# Altium PCB MDBT42Q.PcbDoc
Units mil, origin at the board's own origin, x right, y up, seen from the top; angles counter-clockwise.
Board outline 1035.03 x 1710.03 mil, 2 copper layers (Top Layer, Bottom Layer); 12 components, 9 nets, 28 pads, 2 vias.
Unrouted connection lines stored in the file: 22.
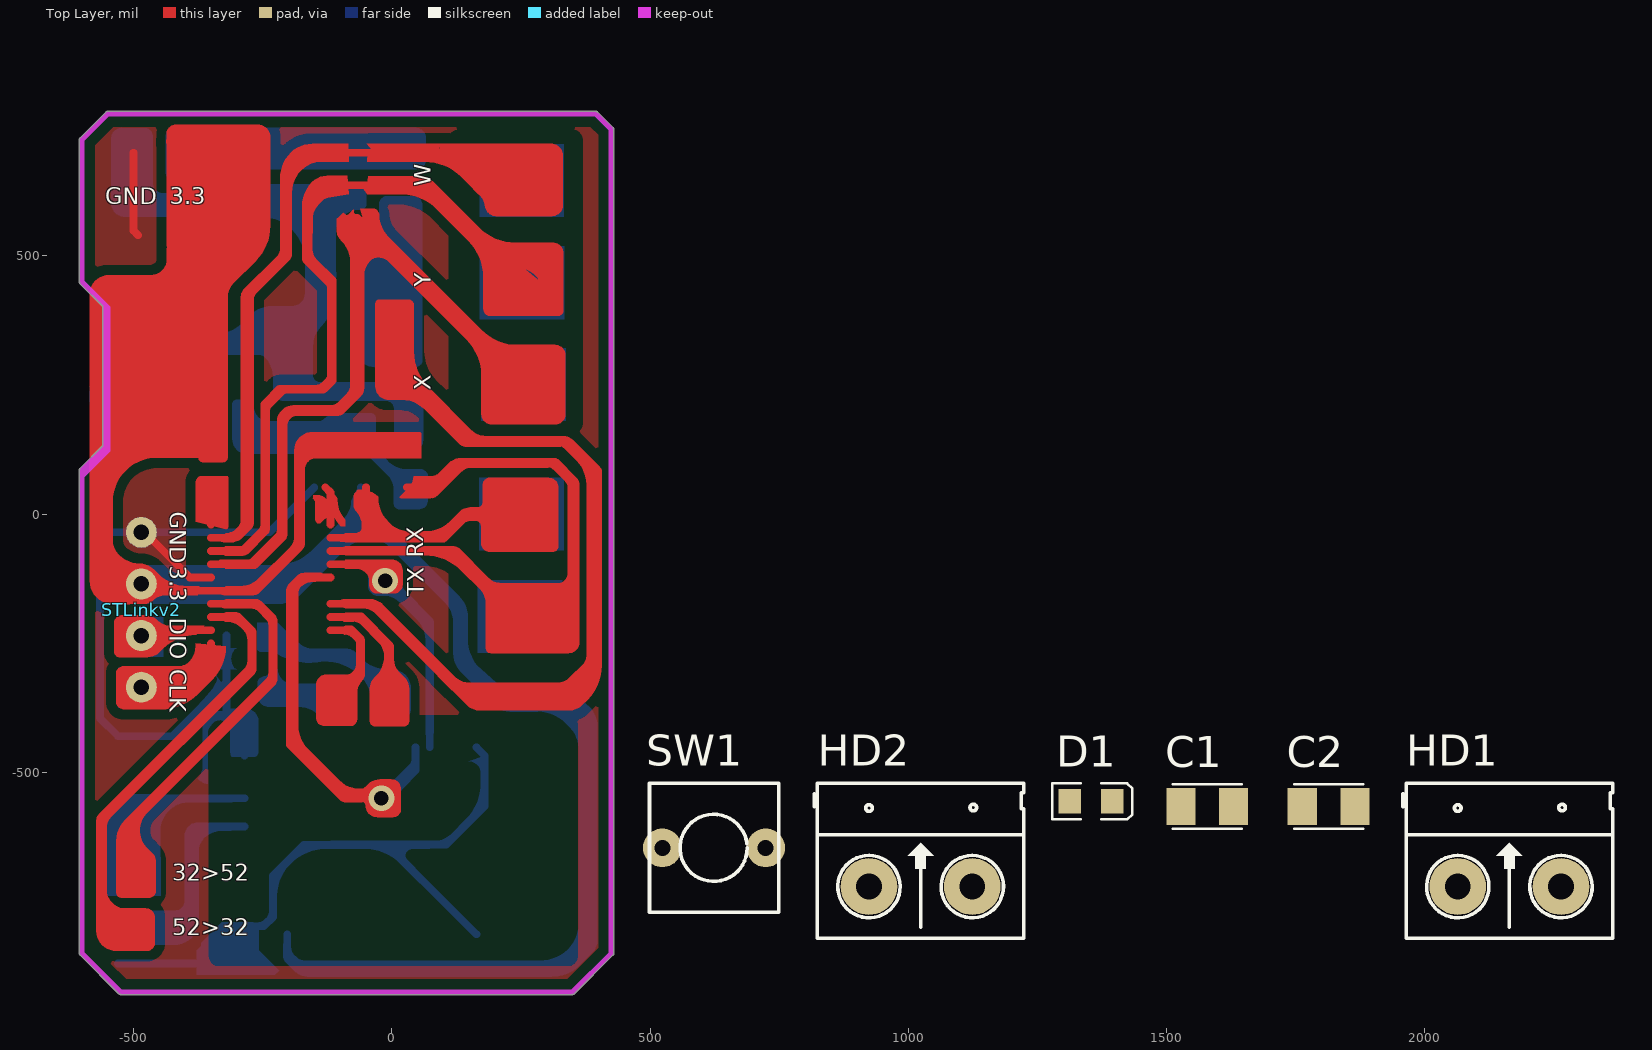
[diagram p0: Top Layer view]
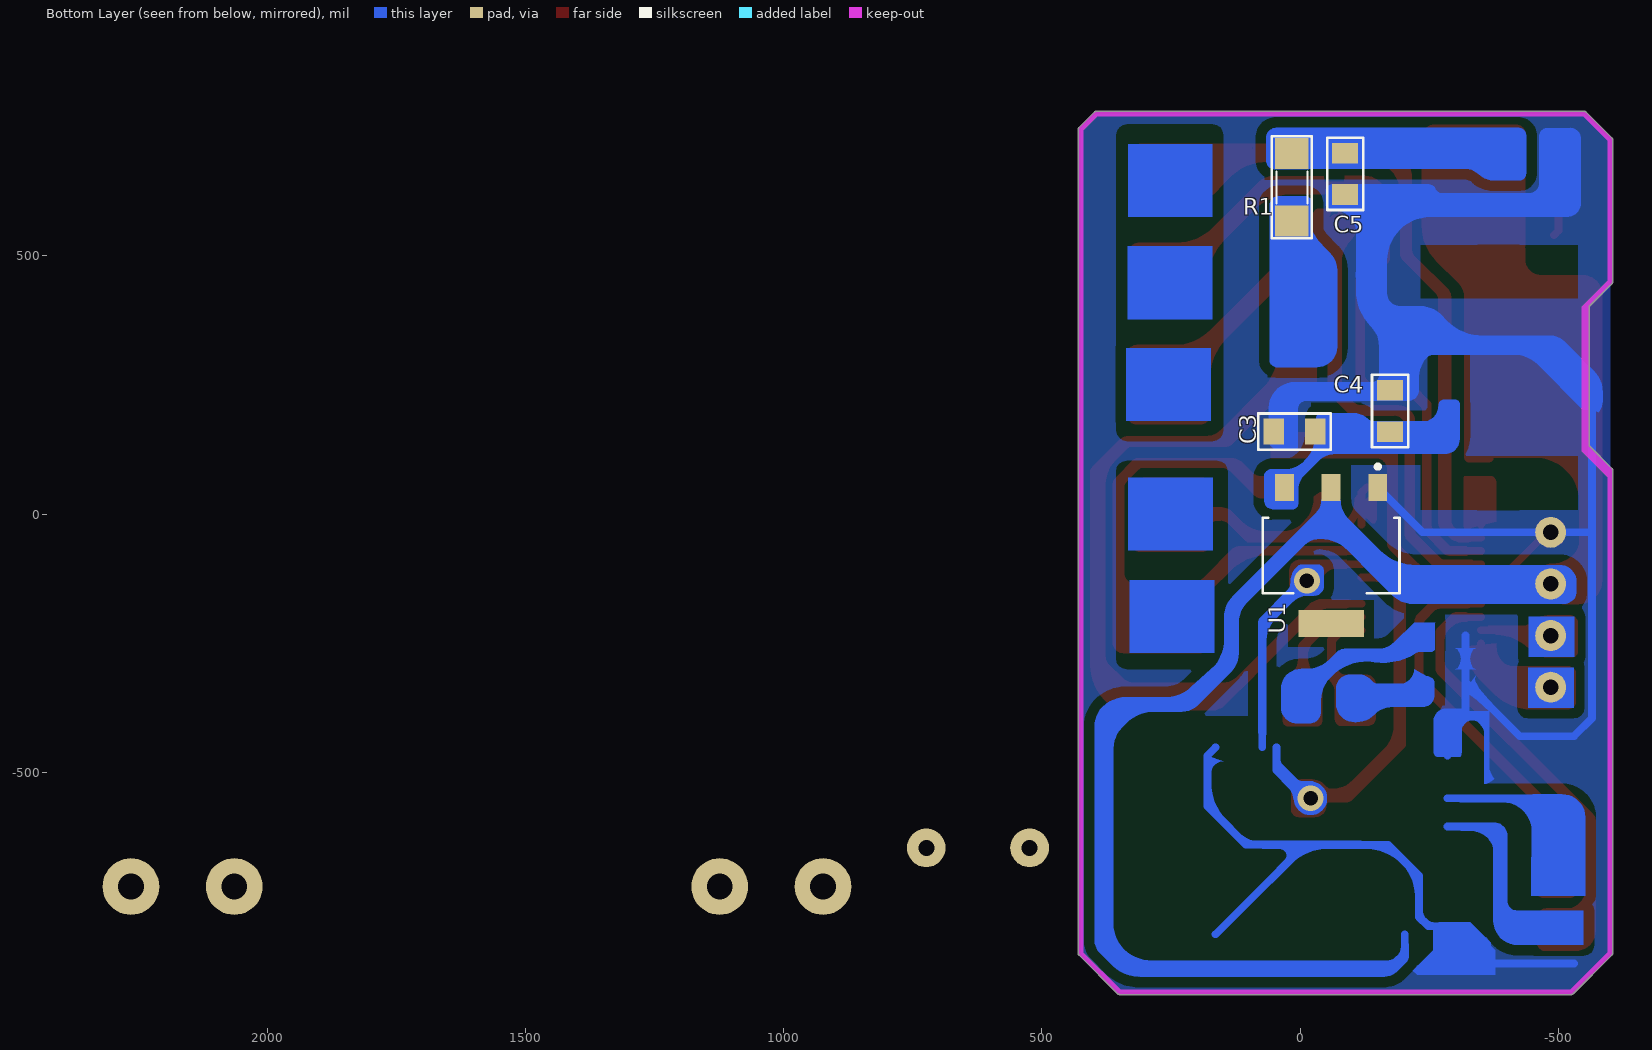
[diagram p1: Bottom Layer view, seen from below]

## Layer stack, top to bottom
Top Solder: solder mask 0.4, Solder Resist, Dk 3.5
Top Layer: signal copper 1.4
Dielectric1: dielectric 12.6, FR-4, Dk 4.8
Bottom Layer: signal copper 1.4
Bottom Solder: solder mask 0.4, Solder Resist, Dk 3.5

## Board outline
-605.02,-850 -605.02,85 cw(c-600,85) -603.53,88.56 -603.55,88.55 -559.66,132.43 -559.66,402.57 -603.55,446.45 ccw(c-600,450) -603.53,446.44 -603.55,446.45 cw(c-600,450) -605.02,450 cw(c-600,450) -605.02,450.03 -605.02,450 -605.02,725 cw(c-600,725) -603.55,728.55 -553.55,778.55 -553.56,778.53 cw(c-550,775) -550,780.02 395,780.02 cw(c395,775) 398.56,778.53 398.55,778.55 428.55,748.55 428.53,748.56 cw(c425,745) 430.01,745 430.01,-850 cw(c425,-850) 428.53,-853.56 428.55,-853.55 353.55,-928.55 353.56,-928.53 cw(c350,-925) 350,-930.01 -525,-930.01 cw(c-525,-925) -528.56,-928.53 -528.55,-928.55 -603.55,-853.55 -603.53,-853.56 cw(c-600,-850)

## Design rules (kind name [scope] priority, off if disabled: settings)
Clearance [All] p1: gap=20 ignorepadtopadclearanceinfootprint=FALSE except(0: Arc-Hole Track-Hole SMDPad-Hole THPad-Hole Via-Hole Fill-Hole Poly-Hole Region-Hole Text-Hole)
PlaneClearance [All] p1: clearance=39.37
PlaneConnect [All] p1: planeconnectstyle=Direct reliefexpansion=20 reliefentries=4 reliefconductorwidth=10 reliefairgap=10
PolygonConnect [All] p1: connectstyle=Direct reliefconductorwidth=10 reliefentries=4 polygonreliefangle="90 Angle" airgapwidth=10
RoomDefinition MDBT42Q [InComponentClass('MDBT42Q')] p1: confinementstyle=ConfineIn formatcopy=TRUE lockcomponents=FALSE outline 474,-866 2374,-866 2374,-411 474,-411
RoutingVias [All] p1: holewidth=28 width=50 viastyle="Through Hole" minholewidth=28 minwidth=50 maxholewidth=28 maxwidth=50
SolderMaskExpansion [All] p1: expansion=4
Width [All] p1: maxlimit=35 minlimit=15 preferedwidth=20 minimp=50.000000 maximp=50.000000 favimp=50.000000
28 further rules are at their usual default settings.

## Components (designator, comment, footprint, x,y, rotation, side; value= is the part's Value field where it differs from the comment)
C1 "C3216X5R1A106K160AB" CAPC3216X180 1579,-566 r0 top
C2 "C3216X5R1A106K160AB" CAPC3216X180 1814,-566 r0 top
C3 "2u2" 0805C-GENERIC -19.02,160 r0 bottom
C4 "2u2" 0805C-GENERIC -174,170 r90 bottom
C5 "10u" 0805C-GENERIC -87,689 r270 bottom
D1 "LED SMD" LED_0805_Blue 1354,-556 r0 top
HD1 "Header 2" HED2 2064,-721 r0 top
HD2 "Header 2" HED2 924,-721 r0 top
R1 "RESISTOR SMD" RES-SM-1206 16,568 r90 bottom value=1K
STLinkv2 "JP" "Jumper 4x1" -425,-295 r0 top
SW1 "SW" SW2 524,-646 r0 top
U1 "AMS1117-3.3" SOT229P700X180-4N -60,-80 r0 bottom

## Footprints (in the part's own frame and the unit in brackets; to place one, negate y for a bottom-side part, rotate by r counter-clockwise, add the part's x,y. Pads: shape width x height; smd on the part's side, far side on the other; paste and mask are expansions set on the pad)
0805C-GENERIC [mil] "CAPACITOR 0805"
  rect 40x50 smd: 1(-10,0) 2(70,0)
  silkscreen extent -40,-35 100,35, body extent -11,-25 70,25, height 26
CAPC3216X180 [mm]
  rect 1.44x1.82 smd: 1(-1.295,0) 2(1.295,0)
  silkscreen extent -1.7,-1.09 1.7,1.09
HED2 [mil] "Header 2, 2 pin, hight 300mil, Pin to Pin 200, Colour Green"
  round 110 hole 50: 1(0,0) 2(200,0)
  silkscreen extent -106,-100 300,200, body extent -92,-140 302,155, height 394
"Jumper 4x1" [mil]
  round 60 hole 30: 1(-60,260) 2(-60,160) 3(-60,60) 4(-60,-40)
LED_0805_Blue [mm] "Chip LED, 2-Leads, Body 2.0x1.3mm, IPC Medium Density"
  rect 1.1x1.2 smd: 1(-1.05,0) 2(1.05,0)
  silkscreen extent -1.91,-0.89 2.03,0.89, body extent -1,-0.63 1,0.62, height 0.68
RES-SM-1206 [mil]
  rect 60x65 smd: 1(0,0) 2(130,0)
  silkscreen extent -34,-38 164,39, body extent 2,-31 128,31, height 40
SOT229P700X180-4N [mm]
  rect 0.93x1.31 smd: 1(-2.29,-3.345) 2(0,-3.345) 3(2.29,-3.345)
  rect 3.24x1.31 smd: 4(0,3.345)
  silkscreen extent -3.36,-4.47 3.36,1.86
SW2 [mil] "SW button 2pin, 250x 250 mil"
  round 75 hole 31: 1(0,0) 2(200,0)
  silkscreen extent -25,-125 225,125

## Part data
C1 C2: "C Series 1206 10 uF 10 V ±10 % Tolerance X5R SMT Multilayer Ceramic Capacitor", Package="1206 TDK", Availability=Unavailable, MF=TDK, MP=C3216X5R1A106K160AB, Price="0.19 USD", SnapEDA_Link=https://www.snapeda.com/parts/C3216X5R1A106K160AB/TDK/view-part/?ref=snap
C3 C4 C5: library part 0805C-2U2-6V3-X5R-PAN, "CAPACITOR 0805 CERAMIC", Manufacturer="Panasonic - ECG", Manufacturer Part Number=ECJ-1VB0J225K, Supplier Part Number 1=PCC2273TR-ND, Reel=C7, Supplier 1=Digi-Key
D1: "LED"
HD1 HD2: library part Hed2, "Header 2 (Green)"
R1: "Resistor"
STLinkv2: library part "Jumper 4x1"
SW1: library part "Tact SW - 2Pin", "Switch button 2 pin"
U1: "Sot223/Pkg 1-Amp 3.3-Volt Low Drop Out Voltage Regulatator", Package=None, Availability=Unavailable, MF="Advanced Monolithic Systems", MP=AMS1117-3.3, Price=None, SnapEDA_Link=https://www.snapeda.com/parts/AMS1117-3.3/Advanced%20Monolithic%20Systems/view-part/?ref=snap

## Via types
v1: diameter 50, hole 28, Top Layer to Bottom Layer, 2 vias

## Nets (pads, with @x,y where several pads share a name; then routed paths per layer and width w, separated by ;. In a path a pad name is that pad's centre, name@x,y a point inside that pad or via, vN(x,y) a via of type N, cw(c..) or ccw(c..) an arc to the next point about the centre after c; other vN are vias at no path point)
32>52: 
52>32: 
+3.3V: C2.1 C4.1 D1.1 U1.2 | length 4778.2
  Top Layer w15: -345,135 -345,210.78 -399.21,265 -408.66,265 ; -280,574.02 -280,637.01 -280,700 -400,700 -400,548.66 -408.66,540 -408.66,265 ; -129.01,133.04 -166.96,133.04 -180,120 -180,-60 -267.95,-147.95 -350,-147.95 -472.05,-147.95 -485,-135 -555,-65 -555,118.66 -408.66,265 ; -129,135 -50,135 29,135
  Bottom Layer w15: -485,-135 -420,-135 -405,-150 -206.83,-150 -60,-3.17 -60,12.46 ; -400,700 -205,700 -196,709 -186,699 -87,699 -86,698 16,698 ; -202.32,-813.54 -202.32,-852.68 -180,-875 335,-875 380,-830 380,-430 320,-370 225,-370 135,-280 135,-182.54 -60,12.46 ; U1.2 -60,12.46
+12V: C1.1 C3.1 HD1.2 U1.3
GND: C1.2 C2.2 C3.2 C4.2 C5.2 D1.2 HD1.1 SW1.2 U1.1 | length 3404.5
  Top Layer w15: -478.37,-35 -391.01,-122.36 -350,-122.36
  Bottom Layer w15: -500,700 -500,638.64 -468.39,607.03 -196,607.03 ; -320,-235 -320,-325 ; -285,-467.09 -285,-425 -320,-390 -320,-325 ; U1.1 -236.85,-35 -485,-35 -564.26,-35 -565,-35.74 ; C5.2 -98.97,607.03 -196,607.03 ; C3.2@31.97,160 31.97,203.03 -5,240 C4.2 -195,261 -195,360 ; -565,-35.74 -565,235 -483.82,316.18 -287.91,316.18 -244.09,360 -195,360 ; -565,-35.74 -565,-395 -530,-430 -425,-430 -320,-325 ; -196,607.03 -129,540.03 -129,447 -129,426 -195,360
MD_RESET: 
NetC5_1: C5.1 R1.1 SW1.1 | length 321.9
  Bottom Layer w15: -49,447 -49,414 5,360 16,371 R1.1
PWM_YELLOW: HD2.1 HD2.2 R1.2 STLinkv2.1 STLinkv2.2 STLinkv2.3 STLinkv2.4 | length 369.8
  Top Layer w15: STLinkv2.4@-500,-350 STLinkv2.4 -403.81,-335 -350,-281.19 -350,-250.32 ; STLinkv2.3@-500,-250 STLinkv2.3 -435,-235 -424.72,-224.72 -350,-224.72
SWDCLK: 
pads on no net: U1.4
copper on no net: | length 13507.8
  Top Layer w15: -500,-800 -528.48,-800 -562,-766.48 -562,-592 -270,-300 -270,-230 -300.87,-199.13 -350,-199.13 ; -500,-700 -500,-590 -230,-320 -230,-205 -261.46,-173.54 -350,-173.54 ; -500,700 -500,548.66 -491.34,540 ; -350,-96.77 -266.77,-96.77 -212,-42 -212,183 -195,200 -105,200 -67.4,237.6 -67.4,574.02 250,256.61 250,250 ; -350,-71.18 -286.18,-71.18 -245,-30 -245,210 -214,241 -134.68,241 -116,259.68 -116,446 -163.75,493.75 -163.75,591.25 -117.99,637.01 -67.4,637.01 62.99,637.01 250,450 ; -350,-45.59 -305.59,-45.59 -280,-20 -280,425 -204.16,500.84 -204.16,649.84 -154,700 -67.4,700 105.5,700 156,649.5 250,649.5 ; -350,-20 -350,55 ; -129,52.32 -118.66,41.98 -118.66,-20 ; -118.66,-224.72 -80.28,-224.72 -60,-245 -60,-310 -105,-355 ; -118.66,-199.13 -62.53,-199.13 -5,-256.66 -5,-355 ; -118.66,-173.54 -38.64,-173.54 142.82,-355 340,-355 395,-300 395,80 335.32,139.68 145.32,139.68 5,280 5,360 ; -118.66,-122.36 -170.13,-122.36 -190,-142.23 -190,-445.92 -85.92,-550 v1(-20,-550) ; -118.66,-96.77 -45.07,-96.77 v1(-12.88,-128.96) v1@-12.88,-122.88 ; -118.66,-71.18 121.18,-71.18 250,-200 255,-205 320,-205 355,-170 355,60 315,100 132.95,100 85.27,52.32 29,52.32 ; -118.66,-45.59 -5,-45.59 ; -50,52.32 -50,-0.59 -5,-45.59 ; 250,0 145,0 99.41,-45.59 -5,-45.59
  Bottom Layer w15: -530.01,-870 -357.21,-870 -285,-797.79 -247.79,-797.79 -230,-780 -230,-700 -170,-640 -9.72,-640 ; -500,-800 -411.05,-800 -386.73,-775.69 -386.73,-631.73 -359.88,-604.88 -285,-604.88 ; -500,-700 -500,-600 -449.76,-549.76 -285,-549.76 ; -287.91,213.82 -287.91,187.55 -260.36,160 -174,160 -70,160 -70,151.85 30.16,51.69 ; -240,-325 -210,-355 -110,-355 ; -240,-235 -207.67,-235 -169.72,-272.95 -87.05,-272.95 -5,-355 ; -105,-355 -110,-355 ; -105,-350 -110,-355 ; v1(-20,-550) 45.71,-484.29 45.71,-451.34 ; v1(-12.88,-128.96) 73.27,-215.11 73.27,-451.34 ; 163.82,-813.54 -9.72,-640 ; 163.82,-451.34 180,-467.52 180,-565 105,-640 -9.72,-640

## Polygon pours and split planes (outlines as drawn)
GND on Top Layer "GND_L01_P013" (solid, pour order 13): -600,725 -550,775 395,775 425,745 425,-850 350,-925 -525,-925 -600,-850
GND on Top Layer "GND_L01_P001" (solid, pour order 1): -276.99,660.49
no net on Top Layer "NONET_L01_P011" (solid, pour order 11): 240.32,727.54
GND on Bottom Layer "GND_L02_P027" (solid, pour order 27): -600,725 -550,775 395,775 425,745 425,-850 350,-925 -525,-925 -600,-850
no net on Bottom Layer "NONET_L02_P017" (solid, pour order 17): -599.05,725.14

## Keep-outs
Top Layer:
  lines w10: -600,-850 -600,85 -554.65,130.35 -554.65,404.65 -600,450 -600,725 -550,775 395,775 425,745 425,-850 350,-925 -525,-925 -600,-850
Bottom Layer:
  lines w10: -600,-850 -600,85 -554.65,130.35 -554.65,404.65 -600,450 -600,725 -550,775 395,775 425,745 425,-850 350,-925 -525,-925 -600,-850
Keep-Out Layer:
  lines w10: -600,-850 -525,-925 350,-925 425,-850 425,745 395,775 -550,775 -600,725 -600,450 -550,400 -550,123.66 -600,73.66 -600,-850

## Other copper
Top Layer:
  region: -85.83,-87.91 0.51,-87.91 cw(c0.51,-108.16) 20.76,-108.16 cw(c17.05,-108.16) 17.05,-111.87 -29.32,-111.87 cw(c-29.32,-98.79) -42.4,-98.79 ccw(c-46.19,-98.79) -46.19,-95 -94.72,-95
  region: -89.93,-105.35 -71.59,-105.35 cw(c-71.59,-137.34) -48.97,-114.72 cw(c-62.71,-128.46) -43.28,-128.46 -43.28,-139.02 ccw(c-28.79,-139.02) -28.79,-153.51 3.72,-153.51 ccw(c3.72,-136.47) 20.76,-136.47 20.76,-110.21 ccw(c0.2,-110.21) 0.2,-89.65 -87.75,-89.65 ccw(c-87.75,-98.06) -96.17,-98.06 -96.17,-99.64
  region: 336.29,63.29 cw(c325.37,52.36) 340.82,52.36 340.82,-114.65 cw(c321.73,-114.65) 321.73,-133.74 271.8,-133.74 ccw(c294.88,-133.74) 294.88,-156.82 325.17,-156.82 ccw(c325.17,-128.83) 353.16,-128.83 353.16,58.16 cw(c355,58.16) 355,60 348.17,60 cw(c348.17,70.24) 337.93,70.24
  region: -515.58,-763.31 cw(c-515.58,-726.54) -552.35,-726.54 -552.35,-725.66 cw(c-553.4,-725.66) -553.4,-726.7 -559.37,-726.7 cw(c-559.37,-729.64) -556.44,-729.64 -556.44,-758.97 ccw(c-545.59,-758.97) -545.59,-769.82 -512.82,-769.82 cw(c-512.82,-777.63) -505,-777.63
  region: -321.13,-190.2 -300.1,-190.2 cw(c-300.1,-200.31) -292.94,-193.16 -265.64,-220.47 cw(c-274.41,-229.24) -262,-229.25 -262,-299.6 cw(c-274.74,-299.6) -265.73,-308.61 -542.75,-585.62 ccw(c-519.56,-608.81) -552.35,-608.81 -552.35,-725.66 ccw(c-517.84,-731.28) -542.23,-756.34 -537.3,-759.97 ccw(c-523.23,-740.83) -515.58,-763.31 -476.34,-763.31 cw(c-476.34,-780.99) -458.66,-780.99 -458.66,-829.42 cw(c-474.92,-829.42) -474.92,-845.68 -532.9,-845.68 cw(c-532.9,-806.79) -571.8,-806.79 -571.8,-591.67 cw(c-556.04,-591.67) -567.18,-580.53 -285.06,-298.4 ccw(c-299.12,-284.33) -279.23,-284.33 -279.23,-243.76 ccw(c-306.18,-243.76) -287.12,-224.7 -291.81,-220.01 ccw(c-321.11,-249.3) -321.12,-207.87 cw(c-321.12,-201.52) -325.61,-206.01 -328.1,-203.52 cw(c-326.44,-201.86) -328.79,-201.86 -328.79,-194.71
  region: -321.51,-164.99 -260.92,-164.99 cw(c-260.92,-176) -253.13,-168.21 -226.4,-194.94 cw(c-238.22,-206.76) -221.51,-206.76 -221.51,-318.7 cw(c-238.85,-318.7) -226.59,-330.96 -475.54,-579.91 ccw(c-446.54,-608.91) -487.55,-608.91 -487.55,-614.92 ccw(c-445.33,-614.92) -475.19,-644.78 -463.92,-656.04 cw(c-481.51,-673.64) -456.64,-673.64 -456.64,-729.29 cw(c-469.83,-729.29) -469.83,-742.48 -523.42,-742.48 cw(c-523.42,-732.59) -533.31,-732.59 -533.31,-632.23 cw(c-477.02,-632.23) -516.82,-592.43 -243.99,-319.59 ccw(c-256.93,-306.64) -238.62,-306.64 -238.62,-215.47 ccw(c-256.27,-215.47) -243.79,-203 -258.69,-188.1 ccw(c-272.14,-201.55) -272.14,-182.53 -322.71,-182.53 cw(c-322.71,-172.66) -329.69,-179.64 cw(c-320.74,-170.69) -333.4,-170.69 -333.4,-169.16
  region: -147.71,-131.15 -153.08,-131.15 ccw(c-153.08,-163.99) -176.3,-140.77 ccw(c-164.36,-152.71) -181.24,-152.71 -181.24,-407.42 ccw(c-113.15,-407.42) -161.3,-455.57 -101.52,-515.35 ccw(c-61.36,-475.2) -61.36,-531.99 ccw(c-61.36,-515.91) -49.99,-527.28 -45.31,-522.6 cw(c-23.53,-544.37) -23.53,-513.58 -0.66,-513.58 cw(c-0.66,-532) 17.76,-532 17.76,-571.57 cw(c2.88,-571.57) 2.88,-586.45 -28.07,-586.45 cw(c-28.07,-563.73) -50.79,-563.73 ccw(c-57.06,-563.73) -57.06,-557.46 -89.97,-557.46 cw(c-89.97,-542.42) -100.6,-553.06 -202.32,-451.34 cw(c-197.41,-446.43) -204.36,-446.43 -204.36,-149.51 cw(c-181.62,-149.51) -197.7,-133.43 -184.04,-119.78 cw(c-169.41,-134.41) -169.41,-113.72 -137.39,-113.72 cw(c-137.39,-119.36) -133.4,-115.37
  region: 42.92,378.68 42.92,315.21 ccw(c142.92,315.21) 72.21,244.49 152.31,164.4 ccw(c184.77,196.86) 184.77,150.95 207.83,150.95 207.83,147.82 cw(c202.38,147.82) 206.23,143.97 156.74,143.97 cw(c156.74,195.04) 120.62,158.93 58.99,220.56 cw(c129.7,291.27) 29.7,291.27 29.7,380.06 ccw(c25.32,380.06) 28.42,383.16
  region: -72.92,-218.9 ccw(c-80.21,-226.19) -80.21,-215.88 -89.71,-215.88 -89.91,-216.09 -89.86,-216.15 -89.86,-218.26 -82.21,-218.26 cw(c-82.21,-223.99) -78.16,-219.94 -77.34,-220.76 ccw(c-72.78,-216.2) -72.78,-222.65
  region: -89.91,-216.09 -79.7,-216.09 cw(c-79.7,-225.68) -72.92,-218.9 -55.5,-236.33 cw(c-62.93,-243.76) -52.42,-243.76 -52.42,-311.17 cw(c-66.32,-311.17) -56.49,-321 ccw(c-30.26,-347.23) -67.36,-347.23 -67.36,-397.68 cw(c-79.4,-397.68) -79.4,-409.72 -131.4,-409.72 cw(c-131.4,-394.67) -146.45,-394.67 -146.45,-329.81 cw(c-127.57,-329.81) -127.57,-310.93 -89.83,-310.93 ccw(c-89.83,-290.37) -75.29,-304.91 ccw(c-91.79,-288.41) -68.46,-288.41 -68.46,-253.36 ccw(c-82.92,-253.36) -72.69,-243.14 -77,-238.84 ccw(c-89.88,-251.72) -89.88,-233.51 cw(c-89.88,-227.51) -94.12,-231.75 -95.14,-230.73 cw(c-92.32,-227.91) -96.31,-227.91 -96.31,-218.82
  region: -89.7,-190.41 -59.83,-190.41 cw(c-59.83,-196.24) -55.7,-192.12 0.67,-248.49 cw(c-7.83,-256.99) 4.19,-256.99 4.19,-281.92 ccw(c37.37,-281.92) 13.91,-305.38 24.85,-316.32 cw(c3.85,-337.32) 33.54,-337.32 33.54,-400.39 cw(c23.03,-400.39) 23.03,-410.9 -31.71,-410.9 cw(c-31.71,-400.19) -42.42,-400.19 -42.42,-336.72 cw(c-14.66,-336.72) -34.29,-317.09 -30.16,-312.95 ccw(c-68.08,-275.03) -14.45,-275.03 -14.45,-274.73 ccw(c-51.05,-274.73) -25.17,-248.85 -60.53,-213.49 ccw(c-73.93,-226.88) -73.93,-207.94 -92.1,-207.94 cw(c-92.1,-205.01) -94.18,-207.08 cw(c-90.26,-203.17) -95.8,-203.17 -95.8,-196.96
  region: 377.15,-275.18 cw(c357.53,-275.18) 371.41,-289.06 343.07,-317.39 cw(c322.34,-296.67) 322.34,-325.98 149.46,-325.98 cw(c149.46,-286.84) 121.78,-314.52 94.9,-287.64 ccw(c108.57,-301.31) 89.24,-301.31 89.24,-313.38 146.15,-370.29 ccw(c168.74,-347.7) 168.74,-379.64 345.18,-379.64 ccw(c345.18,-347.23) 368.1,-370.15 378.96,-359.3 ccw(c313.71,-294.05) 405.99,-294.05 ccw(c388.96,-294.05) 401,-282 391.83,-272.83
  region: 312.3,-268.77 342.9,-268.77 ccw(c342.9,-248.63) 363.04,-248.63
  region: 309.66,-133.62 329.24,-133.62 ccw(c329.24,-117.4) 345.45,-117.4 345.45,39.64 ccw(c310.21,39.64) 335.13,64.57 313.9,85.79 ccw(c302.86,74.75) 302.86,90.37 155.17,90.37 ccw(c155.17,59.53) 133.36,81.34 88.21,36.18 cw(c75.73,48.67) 75.73,31.01 19.83,31.01 cw(c19.83,38.36) 14.64,33.16 32.8,51.33 ccw(c10.13,74) 42.2,74 78.08,74 ccw(c78.08,91.82) 90.68,79.22 110.09,98.62 cw(c134.4,74.31) 134.4,108.69 315.35,108.69 cw(c315.35,99.38) 321.93,105.97 357.95,69.94 cw(c345.66,57.65) 363.04,57.65 363.04,-246.47 cw(c341.41,-246.47) 341.41,-268.11 301.61,-268.11 cw(c301.61,-265.38) 298.89,-265.38 298.89,-206.17 ccw(c283.53,-206.17) 283.53,-190.82
  region: -89.68,-164.67 -40.85,-164.67 cw(c-40.85,-195.74) -18.88,-173.77 -21.51,-176.4 cw(c-24.27,-173.64) -24.27,-177.54 -92.04,-177.54 cw(c-92.04,-171.47) -96.34,-175.76 cw(c-94.69,-174.12) -97.02,-174.12 -97.02,-165.74
  region: 377.07,-289.11 377.07,57.48 ccw(c312.22,57.48) 358.08,103.33 333.59,127.83 ccw(c326.82,121.06) 326.82,130.63 145.17,130.63 cw(c145.17,152.73) 129.54,137.1 63.62,203.03 ccw(c19.33,158.74) 19.33,221.37 -6.01,221.37 cw(c-6.01,246.92) -31.55,246.92 -31.55,408.4 cw(c-24.62,408.4) -24.62,415.33 32.35,415.33 cw(c32.35,404.84) 42.84,404.84 42.84,286.49 ccw(c117.45,286.49) 64.69,233.73 137.29,161.14 ccw(c161.66,185.51) 161.66,151.05 333.1,151.05 cw(c333.1,126.67) 350.33,143.91 402.21,92.03 cw(c390.88,80.7) 406.9,80.7 406.9,-290.04 cw(c371.61,-290.04) 396.56,-315 cw(c361.66,-280.09) 361.66,-329.45 361.27,-329.45 cw(c381.93,-329.45) 367.32,-314.85 374.58,-307.59
  region: -89.68,-182.4 -53.61,-182.4 cw(c-53.61,-211.65) -32.93,-190.97 137.74,-361.64 ccw(c145.19,-354.19) 145.19,-364.72 339.23,-364.72 ccw(c339.23,-346.36) 352.21,-359.35 395.29,-316.27 ccw(c369.48,-290.45) 405.99,-290.45 380.3,-290.45 cw(c380.3,-285.89) 377.07,-289.11 333.21,-332.98 cw(c312.56,-312.32) 312.56,-341.53 162.19,-341.53 cw(c162.19,-309.41) 139.48,-332.12 -16.14,-176.5 ccw(c-43.93,-204.29) -43.93,-164.99 -93.27,-164.99 ccw(c-93.27,-174.79) -100.2,-167.86 ccw(c-98.28,-169.78) -100.99,-169.78 -100.99,-177.95 cw(c-100.99,-182.06) -98.09,-179.15 -96.67,-180.57
  region: -89.67,-87.92 -89.69,-89.96 -89.36,-89.63 -84.98,-89.63 -84.98,-89.6 ccw(c-87.01,-89.6) -85.57,-88.17 -85.83,-87.91
  region: -89.74,-62.44 120.83,-62.44 cw(c120.83,-75.77) 130.26,-66.35 186,-122.09 ccw(c213.84,-94.24) 213.84,-133.62 309.66,-133.62 cw(c309.66,-141.2) 317.25,-141.2 317.25,-263.82 cw(c312.3,-263.82) 312.3,-268.77 191.42,-268.77 cw(c191.42,-259.45) 182.1,-259.45 182.1,-172.15 ccw(c144.76,-172.15) 171.17,-145.75 134.63,-109.21 ccw(c63.92,-179.92) 63.92,-79.92 -89.74,-79.92 ccw(c-103.58,-79.92) -93.8,-70.14 -98.82,-65.12
  region: -89.76,-54.47 98.59,-54.47 ccw(c98.59,-42.98) 106.72,-51.11 140.07,-17.75 cw(c153.45,-31.12) 153.45,-12.21 160.45,-12.21 cw(c160.45,-25.08) 173.32,-25.08 173.32,-56.98 ccw(c188.99,-56.98) 188.99,-72.66 312.11,-72.66 ccw(c312.11,-62.01) 322.75,-62.01 322.75,51.32 ccw(c303.73,51.32) 303.73,70.34 189.27,70.34 ccw(c189.27,57.18) 176.11,57.18 176.11,23.32 cw(c166.04,23.32) 166.04,13.26 150.7,13.26 ccw(c150.7,-12.54) 132.46,5.7 113.61,-13.15 cw(c64.78,35.68) 64.78,-33.38 ccw(c64.78,-46.74) 55.33,-37.29 52.15,-40.47 cw(c37.28,-25.61) 37.28,-46.63 -100.65,-46.63
  region: -89.97,-36.9 -72.29,-36.9 ccw(c-72.29,-20.08) -60.4,-31.97 ccw(c-66.5,-25.86) -57.87,-25.86 -57.87,-20.93 ccw(c-95.57,-20.93) -68.91,5.73 -69.52,6.34 cw(c-59.71,16.15) -73.58,16.15 -73.58,35.39 cw(c-65.08,35.39) -71.09,41.4 -65.5,46.98 -58.11,46.98 cw(c-58.11,2.08) -26.36,33.83 -26.36,32.91 ccw(c42.85,32.91) -6.09,-16.03 ccw(c35.79,25.85) 35.79,-33.38 93.78,-33.38 93.78,-53.59 93.73,-53.63 -95.64,-53.63 cw(c-95.64,-38.89) -106.06,-49.31 -103.77,-47.03 ccw(c-106.3,-44.5) -102.72,-44.5
  region: -105.5,30.79 -105.5,27.13 ccw(c-51.47,27.13) -89.67,-11.08 -89.67,-21.33 cw(c-93.09,-21.33) -90.67,-23.74 -98.45,-23.74 cw(c-54.71,20) -116.57,20 -116.57,23.25 cw(c-96.45,23.25) -110.68,37.47 -110.44,37.71
  region: -147.73,-11.31 -147.73,18.56 ccw(c-164.68,18.56) -152.69,30.55 -152.53,30.71 -152.53,36.86 -142.25,36.86 cw(c-142.25,18.02) -128.92,31.34 cw(c-142.25,18.02) -123.4,18.02 -123.4,-6.51 ccw(c-123.4,-16.37) -130.37,-9.39 -136.79,-15.81 cw(c-140.62,-11.98) -140.62,-17.39 -144.36,-17.39
  region net +3.3V: -321.08,-139.22 -294.59,-139.22 ccw(c-294.59,-85.39) -256.53,-123.45 -198.02,-64.94 ccw(c-220.37,-42.58) -188.76,-42.58 -188.76,124.09 cw(c-153.76,124.09) -153.76,159.08 cw(c-153.76,145.59) -140.27,145.59 -140.27,114.54 cw(c-146.26,114.54) -146.26,108.55 ccw(c-146.26,86.3) -168.52,86.3 -168.52,-55.97 cw(c-187.61,-55.97) -174.11,-69.47 -256.79,-152.16 cw(c-267.4,-141.55) -267.4,-156.55 -325.45,-156.55 cw(c-325.45,-143.97) -334.35,-152.86 -333.73,-152.24 ccw(c-340.04,-145.94) -331.12,-145.94
  region net +3.3V: -150.07,159.08 ccw(c-150.07,121.6) -187.55,121.6 -187.55,103.53 ccw(c-172.74,103.53) -172.74,88.73 cw(c-152.92,88.73) -152.92,108.55 -148.62,108.55 ccw(c-148.62,120.41) -136.76,120.41 -136.76,130.15
  region net +3.3V: 56.35,108.55 -148.62,108.55 cw(c-148.62,116.97) -157.04,116.97 -157.04,152.12 cw(c-150.07,152.12) -150.07,159.08 53.05,159.08 cw(c53.05,155.28) 56.85,155.28 56.85,108.76
  region net +3.3V: -435.49,510.98 -435.49,494.09 cw(c-466.67,494.09) -466.67,462.91 -547.72,462.91 ccw(c-547.72,425.72) -584.91,425.72 -584.91,143.74 ccw(c-576.03,143.74) -576.03,134.85 -447.25,134.85 ccw(c-447.25,178.16) -403.94,178.16 -403.94,503.42 ccw(c-409.5,503.42) -409.5,508.98
  region net +3.3V: -435.49,519.84 -435.49,738.99 cw(c-422.24,738.99) -431.61,748.36 cw(c-417.88,734.63) -417.88,754.05 -416.79,754.05 -416.79,502.29 cw(c-441.8,502.29) -424.12,484.61
  region: -53.63,369.68 -53.63,244.22 cw(c-75.54,244.22) -62.13,226.89
  region: -80.13,326.55 -80.13,250.88 cw(c-104.57,250.88) -87.29,233.61 -103.71,217.19 cw(c-119.7,233.18) -119.7,210.56 -192.16,210.56 ccw(c-192.16,185.14) -210.14,203.12 -215.98,197.27 ccw(c-201,182.29) -222.19,182.29 -222.19,-32.14 cw(c-229.81,-32.14) -224.42,-37.53 -272.69,-85.8 cw(c-277.52,-80.98) -277.52,-87.8 -329.56,-87.8 ccw(c-329.56,-97.92) -336.72,-90.76 -322.6,-104.88 ccw(c-321.08,-103.37) -321.08,-105.51 -265.97,-105.51 ccw(c-265.97,-97.85) -260.56,-103.27 -205.79,-48.5 ccw(c-212.9,-41.39) -202.84,-41.39 -202.84,170.63 cw(c-182.56,170.63) -196.9,184.97 cw(c-182.18,170.25) -182.18,191.07 -103.16,191.07 ccw(c-103.16,204.24) -93.84,194.93 -60.05,228.72 ccw(c-74.01,242.69) -54.26,242.69 -54.26,343.14 ccw(c-60.9,343.14) -56.21,347.83 -59.08,344.96 ccw(c-46.64,332.52) -64.23,332.52
  region: -173.61,512.37 -173.61,495.22 ccw(c-161.11,495.22) -169.95,486.39 -126.79,443.22 cw(c-131.39,438.61) -124.88,438.61 -124.88,269.48 cw(c-134.37,269.48) -127.66,262.77 -135.38,255.04 cw(c-147.4,267.06) -147.4,250.06 -216.22,250.06 ccw(c-216.22,241.27) -222.44,247.49 -249.22,220.7 ccw(c-237.21,208.68) -254.2,208.68 -254.2,-22.72 cw(c-260.84,-22.72) -256.15,-27.42 -290.62,-61.89 cw(c-291.91,-60.6) -291.91,-62.42 -322.58,-62.42 ccw(c-322,-63.62) -323.33,-63.78 -323.33,-80.02 -287.25,-80.02 ccw(c-287.25,-67.51) -278.4,-76.35 -239.9,-37.85 ccw(c-248.39,-29.37) -236.39,-29.37 -236.39,199.2 cw(c-224.19,199.2) -232.82,207.83 -208.45,232.2 cw(c-204.2,227.96) -204.2,233.96 -135.29,233.96 ccw(c-135.29,249.08) -124.6,238.39 -110.6,252.38 ccw(c-118.53,260.31) -107.32,260.31 -107.32,452.24 ccw(c-114.76,452.24) -109.5,457.5 -145.95,493.95 cw(c-127.58,512.32) -153.56,512.37
  region: -321.13,-36.71 ccw(c-321.13,-9.66) -302,-28.79 -297.42,-24.21 ccw(c-310.54,-11.09) -291.99,-11.09 -291.99,421.36 cw(c-272.34,421.36) -286.23,435.26 -223.69,497.8 ccw(c-242,516.12) -216.1,516.12 -193.65,516.12 -193.61,516.15 -193.61,503.09 cw(c-210.3,503.09) -198.5,491.29 -263.14,426.65 ccw(c-253.03,416.53) -267.33,416.53 -267.33,-16.85 cw(c-283.18,-16.85) -271.97,-28.06 -289.18,-45.26 cw(c-311.04,-23.4) -311.04,-54.32 -324.08,-54.32 cw(c-324.08,-41.75) -332.97,-50.64
  region net +3.3V: -540.51,-34.83 -540.51,-51.38 ccw(c-503.9,-51.38) -529.79,-77.27 -527.75,-79.3 ccw(c-488.14,-39.69) -488.14,-95.71 -483.03,-100.81 cw(c-508.57,-126.35) -472.46,-126.35 cw(c-504.69,-126.35) -481.9,-149.14 -505.07,-172.31 cw(c-509.76,-167.62) -509.76,-174.25 -539.21,-174.25 cw(c-539.21,-128.7) -584.76,-128.7 -584.76,-30.54 cw(c-580.05,-30.54) -580.05,-25.83
  region: -86.3,654.99 -126.14,654.99 ccw(c-126.14,616.02) -153.69,643.57 ccw(c-105.61,595.49) -173.61,595.49 -173.61,512.32 -153.56,512.32 -153.33,575.13 cw(c-106.79,568.68) -135.13,606.16 cw(c-121,594.75) -123.98,612.67 -83.63,619.39
  region: -84.06,717.33 -154.2,717.33 ccw(c-154.2,659.01) -195.44,700.25 ccw(c-145.72,650.53) -216.04,650.53 -216.04,514.58 ccw(c-213.95,514.58) -215.42,513.11 cw(c-208.07,505.76) -208.07,516.15 -193.61,516.15 -193.61,622.03 cw(c-131.03,622.03) -175.28,666.28 cw(c-136.13,627.12) -136.13,682.5 -83.5,682.5
  region: -80.13,326.55 -80.13,488.37 ccw(c-137.54,488.37) -96.95,528.96 cw(c-72.77,553.14) -106.96,553.14 -106.96,572.3 ccw(c-106.96,576.2) -104.2,573.44 -93.71,583.93 ccw(c-71.86,605.78) -71.86,574.87 -49.09,574.87 ccw(c3.21,574.87) -33.78,537.89 69.57,434.55 ccw(c84.4,419.72) 63.42,419.72 63.42,419.68 -5.01,488.11 ccw(c-27.12,466) -27.12,497.26 ccw(c-27.12,477.75) -40.92,491.55 -42.63,489.84 ccw(c-16.07,463.28) -53.63,463.28 -53.63,337.85 cw(c-66.88,337.85) -57.51,328.49
  region: 299.27,327.61 243.95,327.61 cw(c243.95,427.61) 173.23,356.9 -6.82,536.96 cw(c35.8,579.58) -24.47,579.58 ccw(c-36.75,579.58) -36.75,591.86 -60.67,591.86 -50.6,553.77 212.46,286.62
  region: 173.85,219.89 173.85,267.93 ccw(c73.85,267.93) 144.56,338.64 -90.78,573.98 -76.74,588.02 cw(c-73.96,585.24) -73.96,589.17 ccw(c-60.87,589.17) -70.13,579.91 218.46,291.33 cw(c204.54,277.42) 224.22,277.42
  region: 185.1,327.76 316.77,327.76 cw(c316.77,308.68) 335.85,308.68 335.85,192.75 cw(c317.38,192.75) 317.38,174.29 192.98,174.29 cw(c192.98,193.66) 173.61,193.66 173.61,313.22 cw(c187.83,313.22) 187.83,327.45
  region: -47.25,619.63 16.52,619.63 cw(c16.52,519.63) 87.23,590.34 148.27,529.3 cw(c77.56,458.59) 177.56,458.59 177.56,396.92 ccw(c190.61,396.92) 190.61,383.88 322.1,383.88 ccw(c322.1,393.86) 332.08,393.86 332.08,413.56 ccw(c326.45,413.56) 326.45,419.19 60.73,634.42 -63.35,641.72
  region: -45.23,654.65 53.11,654.65 cw(c53.11,616.09) 80.38,643.36 168.37,555.36 ccw(c239.08,626.07) 239.08,526.07 311.6,526.07 cw(c311.6,505.3) 332.38,505.3 332.38,399.51 cw(c318.64,399.51) 318.64,385.77 303.79,385.77 cw(c303.79,400.62) 288.94,400.62 288.94,435.14 ccw(c248.86,435.14) 248.86,475.22 39.14,640.77 -47.33,636.7
  region: 158.11,629.4 166.6,620.91 cw(c141.04,589.47) 181.34,593.62 186.28,584.09 ccw(c183.28,591.32) 190.51,588.33 cw(c193.47,591.29) 189.28,591.29 189.28,612.69 ccw(c186.3,612.69) 188.41,614.81 166.16,637.05
  region: -47.86,682.27 64.04,682.27 cw(c64.04,582.27) 134.75,652.98 176.26,611.48 cw(c163.37,598.59) 181.6,598.59 ccw(c181.6,625.17) 200.39,606.37 205.81,611.79 cw(c257.76,663.74) 184.29,663.74 184.29,693.84 135.51,693.84 cw(c135.51,766.36) 84.22,715.08 cw(c45.93,753.38) 45.93,699.22 -46.24,699.22
  region: -48.45,717.59 307.69,717.59 cw(c307.69,694.1) 331.18,694.1 331.18,598.08 cw(c310.46,598.08) 310.46,577.35 201.65,577.35 cw(c201.65,597.66) 181.34,597.67 181.34,605.05 ccw(c108.98,605.05) 128.8,674.65 cw(c128.8,712.71) 90.73,712.71 cw(c85.03,707) 85.02,698.93 -32.81,698.93
  region: -379.11,-14.74 -379.11,63.41 cw(c-368.64,63.41) -368.64,73.88 -319.97,73.88 cw(c-319.97,70.49) -316.59,70.49 -316.59,-23.93 cw(c-321.74,-23.93) -321.74,-29.08
  region net PWM_YELLOW: -321.08,-255.66 cw(c-412.19,-255.66) -347.76,-320.09 -376.03,-348.36 cw(c-446.74,-277.65) -446.74,-377.65 -518.64,-377.65 cw(c-518.64,-362.48) -533.82,-362.48 -533.82,-308.92 cw(c-519.33,-308.92) -519.33,-294.44 -413.96,-294.44 ccw(c-413.96,-263.05) -391.76,-285.25 ccw(c-421.19,-255.81) -379.57,-255.81 -379.57,-249.84
  region net PWM_YELLOW: -363.19,-215.91 -429.8,-215.91 cw(c-429.8,-182.91) -453.13,-206.24 ccw(c-478.06,-231.17) -478.06,-195.91 -522.85,-195.91 ccw(c-522.85,-210.8) -537.73,-210.8 -537.73,-266 ccw(c-527.06,-266) -527.06,-276.68 -472.07,-276.68 ccw(c-472.07,-246.17) -450.49,-267.74 -443.04,-260.29 cw(c-378.57,-324.76) -378.57,-233.59
  region net +3.3V: -373.28,-139.06 -395.28,-139.06 cw(c-395.28,-59.04) -451.87,-115.62 -460.22,-107.28 ccw(c-488.14,-135.2) -488.14,-95.71 -528.42,-95.71 ccw(c-528.42,-109.57) -542.28,-109.57 -542.28,-160.94 ccw(c-529.53,-160.94) -529.53,-173.69 -477.24,-173.69 ccw(c-477.24,-155.39) -464.3,-168.33 cw(c-436.55,-196.08) -436.55,-156.84 -375.68,-156.84
  region net +3.3V: -235.48,558.68 cw(c-332.43,558.68) -263.88,490.13 -306.91,447.1 ccw(c-280.84,421.03) -317.71,421.03 -317.71,109.26 cw(c-326.14,109.26) -326.14,100.82 -365.68,100.82 cw(c-365.68,109.51) -374.37,109.51 -455.38,109.51 ccw(c-455.38,24.37) -540.51,24.37 -540.51,-34.83 cw(c-565.24,-34.83) -565.24,-59.56 cw(c-565.24,-40.09) -584.71,-40.09 -584.71,159.68 -467.09,224.39 ccw(c-527.09,293.94) -435.49,287.19 -435.49,510.98 cw(c-345.51,510.98) -409.13,574.6
  region net +3.3V: -436.95,718.3 cw(c-401.2,718.3) -401.2,754.05 -258.98,754.05 cw(c-258.98,730.55) -235.48,730.55 -235.48,559.92 cw(c-247.87,559.92) -247.87,547.52 cw(c-273.06,572.7) -273.06,537.09 -315.92,537.09 ccw(c-315.92,481.02) -355.57,520.67 -361.38,514.86 ccw(c-338.91,492.39) -370.69,492.39 -370.69,325.11 cw(c-462.92,325.11) -397.7,259.89 -413.66,243.93 cw(c-361.81,295.78) -435.14,295.78 -435.14,732.89
  region net +3.3V: -290.04,552.2 -246.18,552.2 ccw(c-246.18,561.75) -236.63,561.75 -236.63,714.3 ccw(c-244.21,714.3) -244.21,721.89 -315.12,721.89 ccw(c-315.12,710.58) -326.43,710.58 -326.43,562.12 ccw(c-316.51,562.12) -316.51,552.2
  region: 357.27,85.34
  region: -147.78,-131.62
  region: -76.91,-216.46
  region net SWDCLK: -88.96,-88.14
  region: -56.91,-90.91
  region: -435.53,494.46
  region net +3.3V: -435.49,519.84
  region: -106.54,575.44
  region: 184.81,338.04
  region: 72.7,884.68
  region net +3.3V: -239.11,551.15
  region net +3.3V: -243.13,548.47
  region: -272.28,-149.53
  region: 11.3,41.4
  region: -44.5,-8.5
  region net +3.3V: -401.2,754.05 -419.79,754.05 -419.79,751.64 -408.15,740 -400,740
Bottom Layer:
  rectangle: 166.17,-269.08 330.57,-127.48
  rectangle: 168.98,-70.31 333.38,71.29
  rectangle: 172.46,180.65 336.86,322.25
  rectangle: 170.06,377.45 334.46,519.05
  rectangle: 169.46,575.43 333.86,717.03
  rectangle: -548.96,-834.4 -452.46,-767.31
  rectangle: -552.12,-739.1 -447.04,-663.69
  rectangle net PWM_YELLOW: -529.99,-374.95 -441,-296.57
  rectangle net PWM_YELLOW: -531.28,-276.57 -442.29,-198.18
  region: 54.16,-714.52 16.68,-677.05 ccw(c-54.03,-747.76) -54.03,-647.76 -73.92,-647.76 cw(c-73.92,-636.69) -81.74,-644.52 -85.48,-640.77 cw(c-84.45,-641.8) -84.45,-640.35 -2.58,-640.35 ccw(c12.13,-640.35) 1.73,-650.74 58.52,-707.54
  region: 73.2,-647.63 42.87,-647.63 ccw(c42.87,-667.54) 28.79,-653.47 ccw(c35,-659.68) 26.21,-659.68 26.21,-659.75 ccw(c39.86,-659.75) 30.21,-669.4 45.58,-684.78 ccw(c49.46,-688.65) 43.98,-688.65 43.98,-688.82 2.63,-647.48 4.9,-645.21 ccw(c2.98,-643.28) 5.7,-643.28 63.51,-643.28 ccw(c63.51,-640.52) 65.46,-642.47
  region net GND: -312.4,-458.97 -312.4,-419.31 ccw(c-339.95,-419.31) -320.47,-399.83 ccw(c-329.21,-391.1) -316.85,-391.1 -316.85,-376.64 -281.81,-376.64 cw(c-281.81,-399.83) -258.62,-399.83 -258.62,-461.03 cw(c-267.65,-461.03) -267.65,-470.07 -307.48,-470.07 cw(c-307.48,-466.13) -311.42,-466.13
  region: -311.22,-612.63 -327.56,-612.63 ccw(c-327.56,-663.98) -363.87,-627.67 ccw(c-339.3,-652.24) -374.04,-652.24 -374.04,-786.78 cw(c-421.06,-786.78) -421.06,-833.79 -456.8,-833.79 cw(c-456.8,-826.64) -463.96,-826.64 -463.96,-772.76 cw(c-458.71,-772.76) -458.71,-767.52 -420.22,-767.52 ccw(c-420.22,-748.28) -400.98,-748.28 -400.98,-622.27 cw(c-375.63,-622.27) -375.63,-596.93 -310.62,-596.93 cw(c-310.62,-600.43) -307.12,-600.43 -307.12,-604.31 cw(c-308.8,-604.31) -308.8,-605.99
  region: -449.8,-542.35 -507.26,-542.35 ccw(c-507.26,-586.9) -551.81,-586.9 -551.81,-672.01 ccw(c-545.72,-672.01) -545.72,-678.11 ccw(c-545.72,-662.87) -530.48,-662.87 -530.48,-630.48 cw(c-449.76,-630.48) -449.76,-549.76
  region: -308.49,-557.64 -391.88,-557.64 ccw(c-391.88,-614.31) -448.54,-614.31 -448.54,-720.24 cw(c-459.11,-720.24) -459.11,-730.8 -537.99,-730.8 cw(c-537.99,-719.61) -549.19,-719.61 -549.19,-586.61 cw(c-507.11,-586.61) -507.11,-544.53 -409,-544.53 cw(c-409,-549.39) -404.14,-549.39 ccw(c-402.46,-549.39) -402.46,-551.08 -308.56,-551.08
  region: -257.64,-790.03 ccw(c-257.64,-774.53) -246.68,-785.49 -243.67,-782.48 ccw(c-258.59,-767.56) -237.49,-767.56 -237.49,-741.31 -234.14,-744.65 cw(c-241.16,-751.67) -231.24,-751.67 -231.24,-776.82 cw(c-248.23,-776.82) -236.21,-788.83 cw(c-253.07,-771.97) -253.07,-795.81 -261.17,-795.81 ccw(c-265.05,-795.81) -262.31,-793.07 -263.1,-792.28
  region: -42.83,-647.5 -125.15,-647.5 ccw(c-125.15,-747.5) -195.86,-676.79 -197.84,-678.76 ccw(c-138.58,-738.02) -222.38,-738.02 -222.38,-746.69 ccw(c-222.38,-753.54) -227.23,-748.69 -230.86,-752.33 ccw(c-232.94,-750.25) -230,-750.25 -230,-699.94 -168.3,-638.24
  region: 148.88,-478.32 cw(c148.88,-502.14) 172.69,-502.14 172.69,-520.3 cw(c72.69,-520.3) 143.41,-591.01 115.12,-619.3 cw(c83.43,-587.62) 83.43,-632.43 -118.61,-632.43 ccw(c-118.61,-660.61) -138.54,-640.68 ccw(c-136.38,-638.52) -136.38,-641.57 100.85,-641.57 ccw(c100.85,-635.36) 105.24,-639.76 180,-565 180,-467.52
  region: -220.68,-300.33 ccw(c-192.82,-300.33) -192.82,-328.2 -149.47,-328.2 ccw(c-149.47,-314.98) -140.12,-324.33 -133.74,-317.95 cw(c-115.94,-335.75) -115.94,-310.57 -96.12,-310.57 cw(c-96.12,-337.02) -69.67,-337.02 -69.67,-367.01 cw(c-105.39,-367.01) -105.39,-402.74 -108.46,-402.74 cw(c-108.46,-353.17) -143.51,-388.22 ccw(c-180.31,-425.02) -180.31,-372.98 -237.12,-372.98 cw(c-237.12,-350.11) -259.98,-350.11 -259.98,-328.2 cw(c-245.45,-328.2) -245.45,-313.67
  region: -220.4,-209.84 -183.22,-247.03 ccw(c-149.91,-213.73) -149.91,-260.83 -85.2,-260.83 cw(c-85.2,-280.49) -71.29,-266.59 -56.38,-281.5 ccw(c-13.11,-238.23) -13.11,-299.42 -1.88,-299.42 cw(c-1.88,-338.3) 37,-338.3 37,-374.01 cw(c6.2,-374.01) 6.2,-404.82 -17.44,-404.82 cw(c-17.44,-382.08) -40.18,-382.08 -40.18,-359.81 ccw(c-101.15,-359.81) -58.04,-316.7 -60.73,-314.01 ccw(c-131.44,-384.72) -131.44,-284.72 cw(c-158.42,-164.5) -224.35,-268.59 ccw(c-235.35,-295.03) -235.39,-266.39 -251.84,-266.39 cw(c-251.84,-255.43) -259.59,-263.18 -260.51,-262.26 -260.51,-211.36 ccw(c-262.66,-211.36) -261.14,-209.84
  region net +3.3V: 300.7,-354.05 337.13,-354.05 cw(c337.13,-417.72) 382.15,-372.7 cw(c343.63,-411.22) 398.11,-411.22 398.11,-442.55 388.29,-442.55 cw(c388.29,-431.54) 380.5,-439.33 313.2,-372.03 ccw(c294.95,-390.29) 294.95,-364.47
  region net +3.3V: 362.1,-724.97 362.1,-792.17 cw(c291.65,-792.17) 341.46,-841.99 cw(c287.08,-787.61) 287.08,-864.52 264.34,-864.52 264.34,-870.68 ccw(c271.76,-870.68) 266.52,-875.92 314.09,-875.92 ccw(c314.09,-804.57) 364.54,-855.02 ccw(c330.43,-820.91) 378.67,-820.91 378.67,-717.8 ccw(c373.04,-717.8) 377.02,-713.83
  region net +3.3V: 397.79,-826.11 cw(c365.87,-826.11) 388.44,-848.68 362,-875.13 cw(c313.02,-826.14) 313.02,-895.41 cw(c318.84,-895.41) 314.72,-891.29 382.58,-823.43 cw(c390.11,-830.96) 390.11,-820.31
  region net +3.3V: -194.5,-840.67 ccw(c-176.92,-840.67) -189.35,-853.1 -184.46,-857.99 ccw(c-169.5,-843.02) -169.5,-864.19 323.07,-864.19 ccw(c323.07,-846.63) 335.48,-859.04 357.05,-837.47 ccw(c344.67,-825.09) 362.18,-825.09 373.16,-825.09 cw(c373.16,-854.16) 393.72,-833.61 347.07,-880.25 cw(c310.47,-843.65) 310.47,-895.41 -163.54,-895.41 cw(c-163.54,-862.04) -187.14,-885.64 -204.16,-868.62 cw(c-189.74,-854.21) -210.13,-854.21 -210.13,-833.28 cw(c-200.48,-833.28) -207.3,-826.46 -203.63,-830.13
  region: 53.54,-478.75 53.54,-494.69 cw(c43.33,-494.69) 50.55,-501.91 21.89,-530.57 ccw(c43.94,-552.61) 12.76,-552.61 10.42,-554.95 cw(c9.5,-554.02) 9.5,-555.33 9.5,-541.27 cw(c20.17,-541.27) 12.62,-533.72 34.15,-512.18 ccw(c6.26,-484.29) 45.71,-484.29 45.71,-483.28 cw(c58.96,-483.28) 49.59,-473.91
  region: 53.55,-478.8 cw(c43.17,-493.51) 50.54,-500.89 22.63,-528.8 ccw(c48.32,-554.49) 11.98,-554.49 cw(c11.98,-547.36) 6.94,-552.41 5.17,-550.63 ccw(c-7.85,-537.62) 10.56,-537.62 10.56,-533.29 cw(c63.32,-533.29) 26.01,-495.98 50.62,-471.38
  region: 37.79,-478.51 cw(c31.32,-478.51) 35.9,-483.09 6.59,-512.39 cw(c-4.72,-501.08) -4.72,-517.08 -19.01,-517.08 ccw(c-19.01,-549.64) -51.57,-549.64 -51.57,-552.08 ccw(c-21.54,-552.08) -21.54,-582.11 -18.64,-582.11 ccw(c-18.64,-551.48) 11.98,-551.48 cw(c51.47,-551.48) 23.55,-523.56 53.6,-493.51 53.58,-493.49 ccw(c50.27,-469.62) 52.61,-471.96 44.3,-480.26
  region: 65.4,-423.84 65.4,-243.37 ccw(c10.23,-243.37) 49.24,-204.36 ccw(c46.34,-201.47) 50.44,-201.47 50.44,-200.17 cw(c50.44,-206.89) 55.19,-202.14 68.37,-215.32 ccw(c70.54,-217.48) 67.48,-217.48 67.48,-439.05
  region: 81.03,-423.79 81.03,-211.47 ccw(c62.12,-211.47) 75.49,-198.1 25.08,-147.69 cw(c40.72,-132.05) 18.61,-132.05 ccw(c-24.15,-131.99) 6.12,-101.8 ccw(c-4.1,-112.01) -4.1,-97.57 -33.88,-97.57 ccw(c-33.88,-109.25) -45.57,-109.26 -45.57,-139.36 ccw(c-27.16,-139.36) -27.16,-157.77 -16.39,-157.77 cw(c-16.39,-203.73) 16.11,-171.24 49.24,-204.36 cw(c45.99,-227.21) 64.45,-213.35 cw(c51.68,-218.64) 64.45,-223.93 73.27,-215.11 cw(c69.43,-218.95) 74.86,-218.95 74.86,-428.21
  region net +3.3V: -41.67,29.75 ccw(c-2.43,29.75) -30.18,2 129.66,-157.84 cw(c86.58,-200.93) 147.51,-200.93 147.51,-229.73 ccw(c231.2,-240.98) 164.07,-292.2 210.56,-334.2 ccw(c258.71,-286.05) 258.71,-354.14 306.34,-354.14 cw(c306.34,-404.13) 341.69,-368.79 382.01,-409.11 cw(c343.17,-447.96) 398.11,-447.97 398.11,-822.85 cw(c381.39,-822.85) 393.21,-834.68 ccw(c374.9,-852.98) 374.9,-827.1 361.76,-827.1 361.76,-454.08 ccw(c302.51,-454.08) 344.41,-412.18 337.19,-404.96 ccw(c282.57,-459.58) 282.57,-382.34 228.38,-382.34 cw(c228.38,-341.63) 199.59,-370.41 133.89,-304.72 cw(c169.08,-269.53) 119.32,-269.53 119.32,-209.88 ccw(c65.62,-209.87) 103.59,-171.9 -7.96,-60.35 ccw(c-38.51,-90.9) -38.51,-47.7 ccw(c-38.52,-124.99) -93.17,-70.34 -100.35,-77.52 cw(c-95.16,-72.33) -102.51,-72.33 -102.51,-62.33 cw(c-73.7,-62.33) -94.07,-41.96 -82.44,-30.33 ccw(c-140,27.23) -58.59,27.24 -58.59,43.41
  region net +3.3V: -78.16,26.12 cw(c-126.12,26.12) -92.2,-7.79 -153.79,-69.38 cw(c-224.5,1.33) -224.5,-98.67 -502.83,-98.67 ccw(c-502.83,-130.73) -534.89,-130.73 -534.89,-149.79 ccw(c-511.18,-149.79) -511.18,-173.51 -218.75,-173.51 ccw(c-218.75,-116.37) -178.35,-156.77 -57.81,-36.23 ccw(c-100.76,6.72) -40.02,6.72 -40.02,9.5 ccw(c-84.2,9.5) -52.96,40.74 -59.78,47.55 cw(c-51.62,55.72) -63.16,55.72
  region: -267.2,207.73 ccw(c-239.34,207.73) -239.34,179.87 -225.35,179.87 -225.35,166.86 -265.48,166.86 cw(c-265.48,173.74) -272.36,173.74 -272.36,204.72 ccw(c-279.14,204.72) -279.14,211.5
  region: -198.39,139.99 -296.83,139.99 cw(c-296.83,151.85) -308.68,151.85 -308.68,213.64 cw(c-300.78,213.64) -300.78,221.55 -277.88,221.55 cw(c-277.88,212.06) -268.4,212.06 ccw(c-234.84,212.06) -225.35,179.87 -141.74,179.87 ccw(c-141.74,195.79) -130.49,184.53 cw(c-103.58,157.62) -103.58,195.68 -40.64,195.68 cw(c-40.64,185.63) -30.59,185.63 -30.59,156.44 ccw(c42.97,156.44) -9.05,104.42 -5.62,101 ccw(c26.88,133.51) 26.88,87.54 54.19,87.54 cw(c54.19,71.73) 69.99,71.73 69.99,27.54 cw(c51.67,27.54) 51.67,9.21 15.74,9.21 cw(c15.74,21.07) 3.89,21.07 3.89,46.4 ccw(c-39.04,46.4) -8.69,76.76 -33.83,101.9 ccw(c-69.4,66.34) -69.4,116.64 -279.94,116.64 cw(c-279.94,144.3) -307.61,144.3 -307.61,215.08 cw(c-306.53,215.08) -306.53,216.16
  region net NetC5_1: -71.52,472.82 -57.79,459.09 ccw(c-31.99,484.89) -31.99,448.4 cw(c6.83,448.4) -20.62,475.85 1.98,498.45 ccw(c-1.17,501.6) 3.29,501.6 3.29,543.59 0.95,543.59 cw(c0.95,569.47) -17.36,551.17 -22.02,546.5 cw(c-24.04,548.52) -24.04,545.66
  region net NetC5_1: -24.04,545.66 cw(c-37.44,545.66) -27.97,536.19 -57.51,506.65 ccw(c-23.68,472.82) -71.52,472.82
  region net NetC5_1: -16.84,538.93 cw(c-74.69,538.93) -33.79,498.02 -37.91,493.9 -48.12,493.9 ccw(c-48.12,470.5) -71.52,470.5 -71.52,323.38 ccw(c-32.99,323.38) -32.99,284.85 44.94,284.85 ccw(c44.94,299.26) 59.35,299.26 59.35,598.58 ccw(c41.98,598.58) 41.98,615.95 -9.15,615.95 ccw(c-9.15,601.06) -24.04,601.06 -24.04,545.66 ccw(c-16.46,545.66) -16.46,538.09
  region net GND: -167.93,428.08 cw(c-193.03,428.08) -193.03,402.98 -233.07,402.98 ccw(c-233.07,348.42) -271.64,387 -283.75,374.9 cw(c-354.46,445.61) -354.46,345.61 -485.49,345.61 ccw(c-485.49,309.53) -511,335.04 -568.53,277.51 ccw(c-527.17,236.15) -585.66,236.15 -585.66,218.42 ccw(c-555.33,218.42) -576.78,196.97 cw(c-566.01,186.2) -566.01,201.43 -551.72,201.43 ccw(c-551.72,209.23) -546.21,203.72 -460.48,289.44 cw(c-413.6,242.56) -413.6,308.86 -259.33,308.86 cw(c-259.33,288.55) -244.97,302.91 cw(c-281.12,266.77) -230,266.77 -230,240.24 ccw(c-209.68,240.24) -209.68,219.92 -12.31,219.92 cw(c-12.31,202.88) 4.73,202.88 4.73,131.03 ccw(c10.86,131.03) 10.86,124.9 42.19,124.9 ccw(c42.19,143.29) 60.58,143.29 60.58,205.95 ccw(c10.86,205.95) 10.86,255.66 -139.63,255.66 cw(c-139.63,268.95) -152.92,268.95 -152.92,325.36 cw(c-98.26,325.36) -136.91,364.01 ccw(c-206.09,433.19) -108.26,433.19 -108.26,457.71
  region net GND: -500.94,747.82 -479.01,747.82 cw(c-479.01,731.57) -462.76,731.57 -462.76,641.81 ccw(c-442.04,641.81) -442.04,621.09 -275.45,621.09 ccw(c-275.45,635.92) -260.94,632.84 cw(c-246.24,618.14) -246.24,638.93 -62.51,638.93 cw(c-62.51,625.41) -48.99,625.41 -48.99,601.09 cw(c-60.89,601.09) -60.89,589.19 ccw(c-64.23,545.29) -108.14,548.63 -108.14,472.55 cw(c-145.48,465.42) -138.37,428.08 -167.93,428.08 -167.93,490.79 ccw(c-252.81,490.8) -252.81,575.68 -516.09,575.68 cw(c-516.09,603.26) -543.67,603.26 -543.67,726.84 cw(c-522.61,726.84) -522.61,747.9
  region net +3.3V: -16.76,668.19 -321.73,668.19 ccw(c-321.73,634.01) -345.89,658.18 cw(c-374.65,686.93) -374.65,646.27 -424.1,646.27 cw(c-424.1,659.37) -437.2,659.37 -437.2,734.39 cw(c-423.7,734.39) -423.7,747.89 47.08,747.89 cw(c47.08,729.22) 65.74,729.22 65.74,685.28 cw(c48.45,685.28) 48.45,667.98
  region: -308.68,215.22 -308.68,145.38 ccw(c-279.94,145.38) -279.94,116.64 -205.07,116.64 ccw(c-205.07,134.3) -187.41,134.3 -187.41,141.86 ccw(c-218.03,141.86) -218.03,172.48 -240.12,172.48 cw(c-240.12,204.72) -272.36,204.72 ccw(c-282.64,204.72) -282.64,215 -295,215
  region net GND: -313.59,-411.32 -320.89,-404.02 ccw(c-333,-416.13) -333,-399 ccw(c-333,-418.31) -346.66,-404.66 -348,-406 ccw(c-327.98,-426.02) -356.29,-426.02 -356.29,-521.96 cw(c-356.29,-498.43) -372.93,-515.07 -376,-512 ccw(c-399.92,-488.08) -366.09,-488.08 -366.09,-381.7 -322.8,-381.7 cw(c-322.8,-399.8) -310,-387
  region: -257.62,-805.15 -257.62,-844.25 -218.32,-883.56 -226.24,-891.48 -377.29,-891.48 -377.29,-844.11 -369.19,-836 -369.19,-829.77 -329.37,-789.96 -268.49,-789.96 -259.5,-798.95
  region net 32>52: -447.04,-663.69
  region: -451.58,-767.62
  region: -529.3,-199.18
  region: -45.67,-751.66
  region net +3.3V: 196.57,-279

## Silkscreen, mask and mechanical layers (free items; w line width, h text height)
Top Overlay:
  text "W" at 75,635 h31.5 r90
  text "GND" at -555,600 h31.5
  text "3.3" at -430,600 h31.5
  text "Y" at 75,440 h31.5 r90
  text "X" at 75,240 h31.5 r90
  text "GND" at -430,5 h31.5 r270
  text "RX" at 61.23,-84.14 h31.5 r90
  text "3.3" at -430,-100 h31.5 r270
  text "TX" at 62.25,-158.79 h31.5 r90
  text "DIO" at -430,-200 h31.5 r270
  text "CLK" at -430,-300 h31.5 r270
  text "32>52" at -425,-710 h31.5
  text "52>32" at -425,-815 h31.5